# EAGLE board mugsy-cone-mech-pcb-board-eagle (EAGLE 9.7.0)
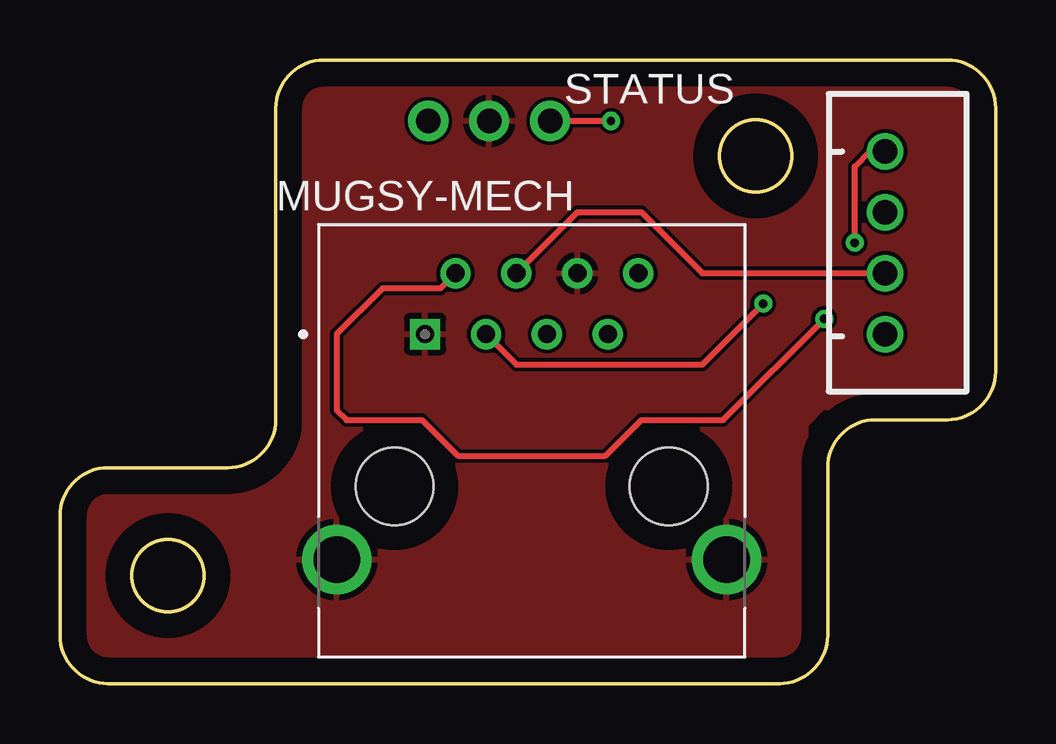
[diagram p0: board, top side]
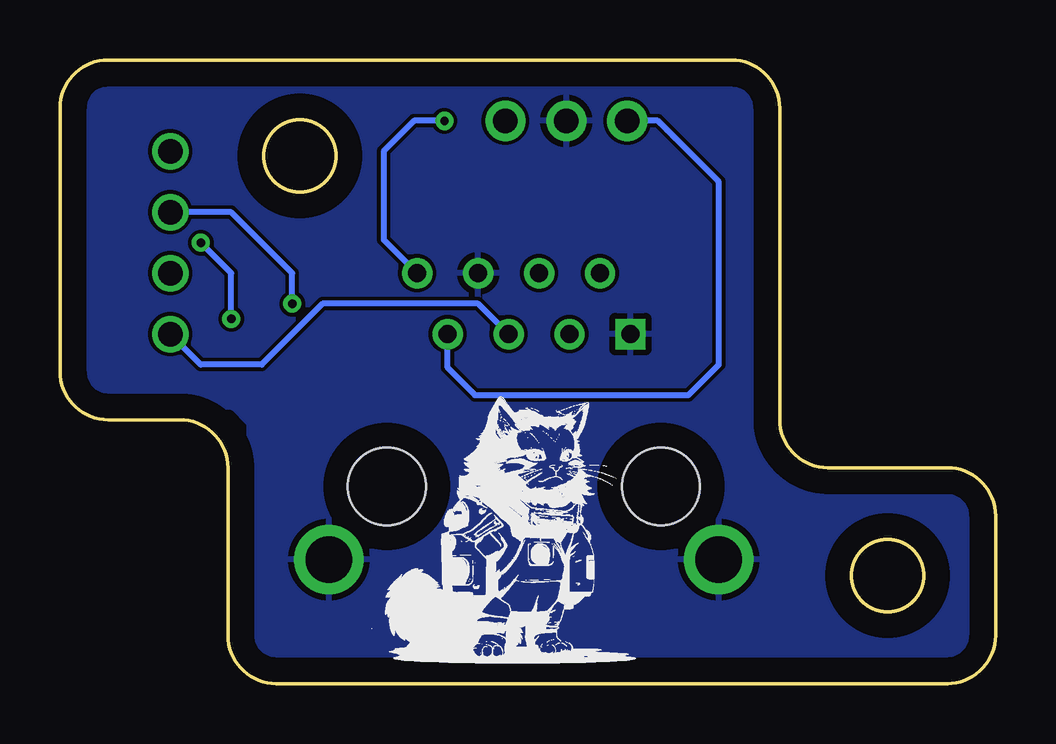
[diagram p1: board, bottom side, seen from below]

Size 39 x 26 mm. Coordinates in mm from the lower left corner, seen from the top.
Outline: 0,2 arc90 2,0 30,0 arc90 32,2 32,9 arc-90 34,11 37,11 arc90 39,13 39,24 arc90 37,26 11,26 arc90 9,24 9,11 arc-90 7,9 2,9 arc90 0,7 0,2
Outline: circle at 4.5,4.5 radius 1.5
Outline: circle at 29,22 radius 1.5
Copper layers (1*16): Top 0.035mm / dielectric 1.5mm / Bottom 0.035mm
Design rules "default": minimum track width 6mil, minimum drill 0.35mm, track to track 6mil, track to pad 6mil, pad to pad 6mil, via to via 6mil, smd to smd 6mil, copper to edge 40mil, drill to drill 6mil, minimum pad ring 10mil, minimum via ring 8mil, stop-mask expansion 4mil, vias tented up to drill 0mil, thermal gap 10mil

## Footprints (pad centres in the part's own frame; a part is rotated, then mirrored left to right if it is on the bottom)
TE_RJ45-8N-B = drill 0.76 square: 1 -4.445,6.35 | drill 0.76: 2 -3.175,8.89; 3 -1.905,6.35; 4 -0.635,8.89; 5 0.635,6.35; 6 1.905,8.89; 7 3.175,6.35; 8 4.445,8.89 | drill 1.93: 9 -8.125,-3.05; 10 8.125,-3.05 | hole 3.25: -5.715,0; 5.715,0
1X03-CLEANBIG = drill 1.016 pad 1.676: 1 -2.54,0; 2 0,0; 3 2.54,0
JST-XH-04-PACKAGE-ROUND-PAD = drill 1.016: 1 -3.81,0; 2 -1.27,0; 3 1.27,0; 4 3.81,0

## Placement (x,y rotation side)
MUGSY-MECH  RJ45-8N-B  [TE_RJ45-8N-B]  19.66,8.22 0 top
STATUS  [1X03-CLEANBIG]  17.89,23.46 0 top
STEP  JST-XH-04-PIN-ROUND-PAD  [JST-XH-04-PACKAGE-ROUND-PAD]  34.4,18.38 270 top

## Library data of the parts
MUGSY-MECH = RJ45-8N-B; AVAILABILITY: In Stock; CHECK_PRICES: https://www.snapeda.com/parts/RJ45-8N-B/TE+Connectivity+Corcom+Filters/view-part/?ref=eda; DESCRIPTION: Corcom FILTER SIGNAL LINE MODULAR 8CONTACTS 1 PORT THROUGH HOLE | TE Connectivity RJ45-8N-B; MF: TE Connectivity; MP: RJ45-8N-B; PACKAGE: None; PRICE: None; PURCHASE-URL: https://www.snapeda.com/api/url_track_click_mouser/?unipart_id=49386&manufacturer=TE Connectivity&part_name=RJ45-8N-B&search_term=None; SNAPEDA_LINK: https://www.snapeda.com/parts/RJ45-8N-B/TE+Connectivity+Corcom+Filters/view-part/?ref=snap
STATUS = adafruit
STEP = Rembrandt Electronics - JST XH Connectors v1-0

## Nets
+5V: MUGSY-MECH.8 STATUS.3
GND: MUGSY-MECH.1 MUGSY-MECH.6 MUGSY-MECH.9 MUGSY-MECH.10 STATUS.2
LED-DATA: MUGSY-MECH.7 STATUS.1
STEP-1: MUGSY-MECH.2 STEP.1
STEP-2: MUGSY-MECH.3 STEP.2
STEP-3: MUGSY-MECH.4 STEP.3
STEP-4: MUGSY-MECH.5 STEP.4

## Tracks (layer width: path | path; a pad name or v marks a point on that pad's centre or on a via)
+5V  (via drill 0.35)
  Top 0.254: STATUS.3 v22.97,23.46
  Bottom 0.254: v22.97,23.46 24.24,23.46 25.51,22.19 25.51,18.51 MUGSY-MECH.8
GND
  pour Top: 9.05,9.36 7.8,8.11 7.76,8.09 1.43,8.09 0.87,7.53 0.87,1.29 1.43,0.73 30.54,0.73 31.1,1.29 31.1,10.79 31.12,10.83 31.79,11.5 31.83,11.52 36.89,11.52 38.08,12.72 38.08,24.68 37.52,25.24 10.32,25.24 9.76,24.68 9.76,9.46 9.74,9.42 9.71,9.38 9.66,9.36
  pour Bottom: 9.74,10.05 7.8,8.11 7.76,8.09 1.43,8.09 0.87,7.53 0.87,1.29 1.43,0.73 30.54,0.73 31.1,1.29 31.1,10.79 31.12,10.83 31.79,11.5 31.83,11.52 36.89,11.52 38.08,12.72 38.08,24.04 36.89,25.24 10.32,25.24 9.76,24.68 9.76,10.1
LED-DATA
  Bottom 0.254: MUGSY-MECH.7 22.84,13.17 21.7,12.03 12.81,12.03 11.54,13.3 11.54,20.92 14.08,23.46 STATUS.1
STEP-1  (via drill 0.35)
  Top 0.254: MUGSY-MECH.2 15.86,16.47 13.44,16.47 11.54,14.57 11.54,11.39 11.95,10.99 15.1,10.99 16.59,9.49 22.73,9.49 24.23,10.99 27.64,10.99 v31.86,15.2 | v33.13,18.38 33.13,21.55 33.77,22.19 STEP.1
  Bottom 0.254: v31.86,15.2 31.86,17.11 v33.13,18.38
STEP-2  (via drill 0.35)
  Top 0.254: MUGSY-MECH.3 19.03,13.3 26.78,13.3 v29.32,15.84
  Bottom 0.254: v29.32,15.84 29.32,17.11 31.86,19.65 STEP.2
STEP-3
  Top 0.254: MUGSY-MECH.4 21.57,19.65 24.24,19.65 26.78,17.11 STEP.3
STEP-4
  Bottom 0.254: MUGSY-MECH.5 21.57,15.84 28.05,15.84 30.59,13.3 33.13,13.3 STEP.4